# Altium PCB Shutdown_2019_v1.1.PcbDoc (part 1 of 2)
Units mil, origin at the board's own origin, x right, y up, seen from the top; angles counter-clockwise.
Board outline 4900 x 3600 mil, 2 copper layers (Top, Bottom); 222 components, 139 nets, 683 pads, 335 vias.
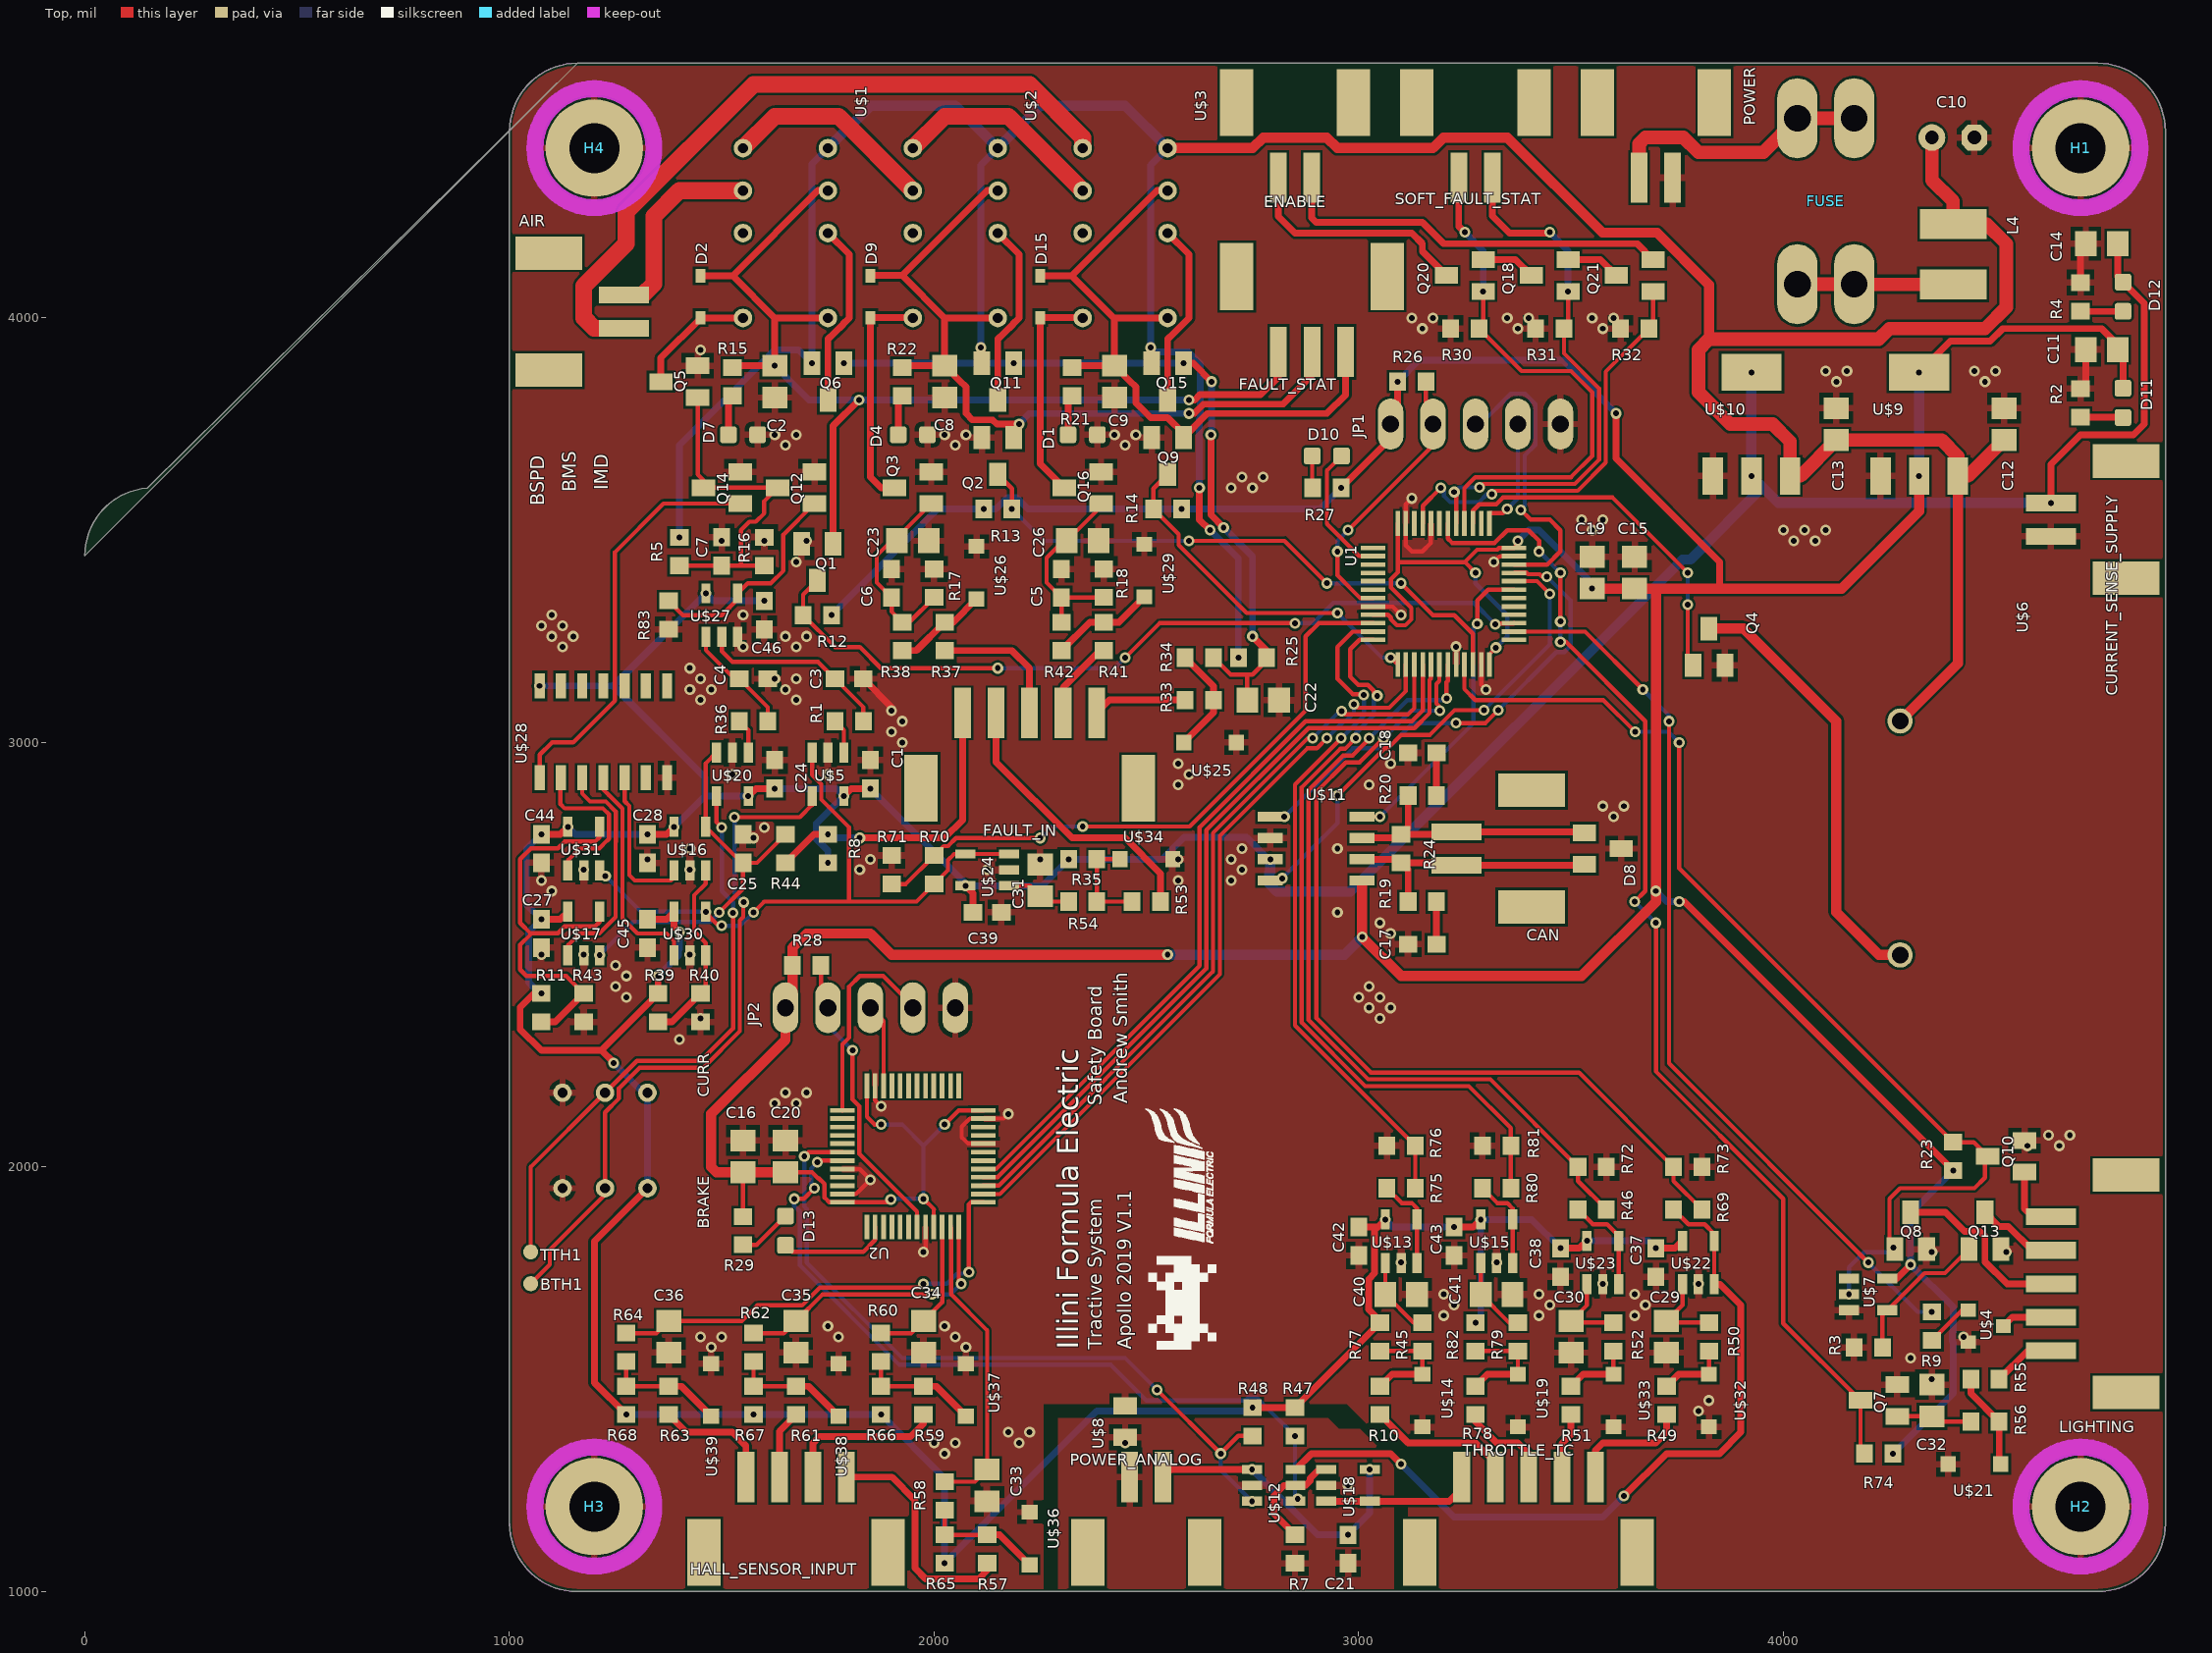
[diagram p0: Top view]
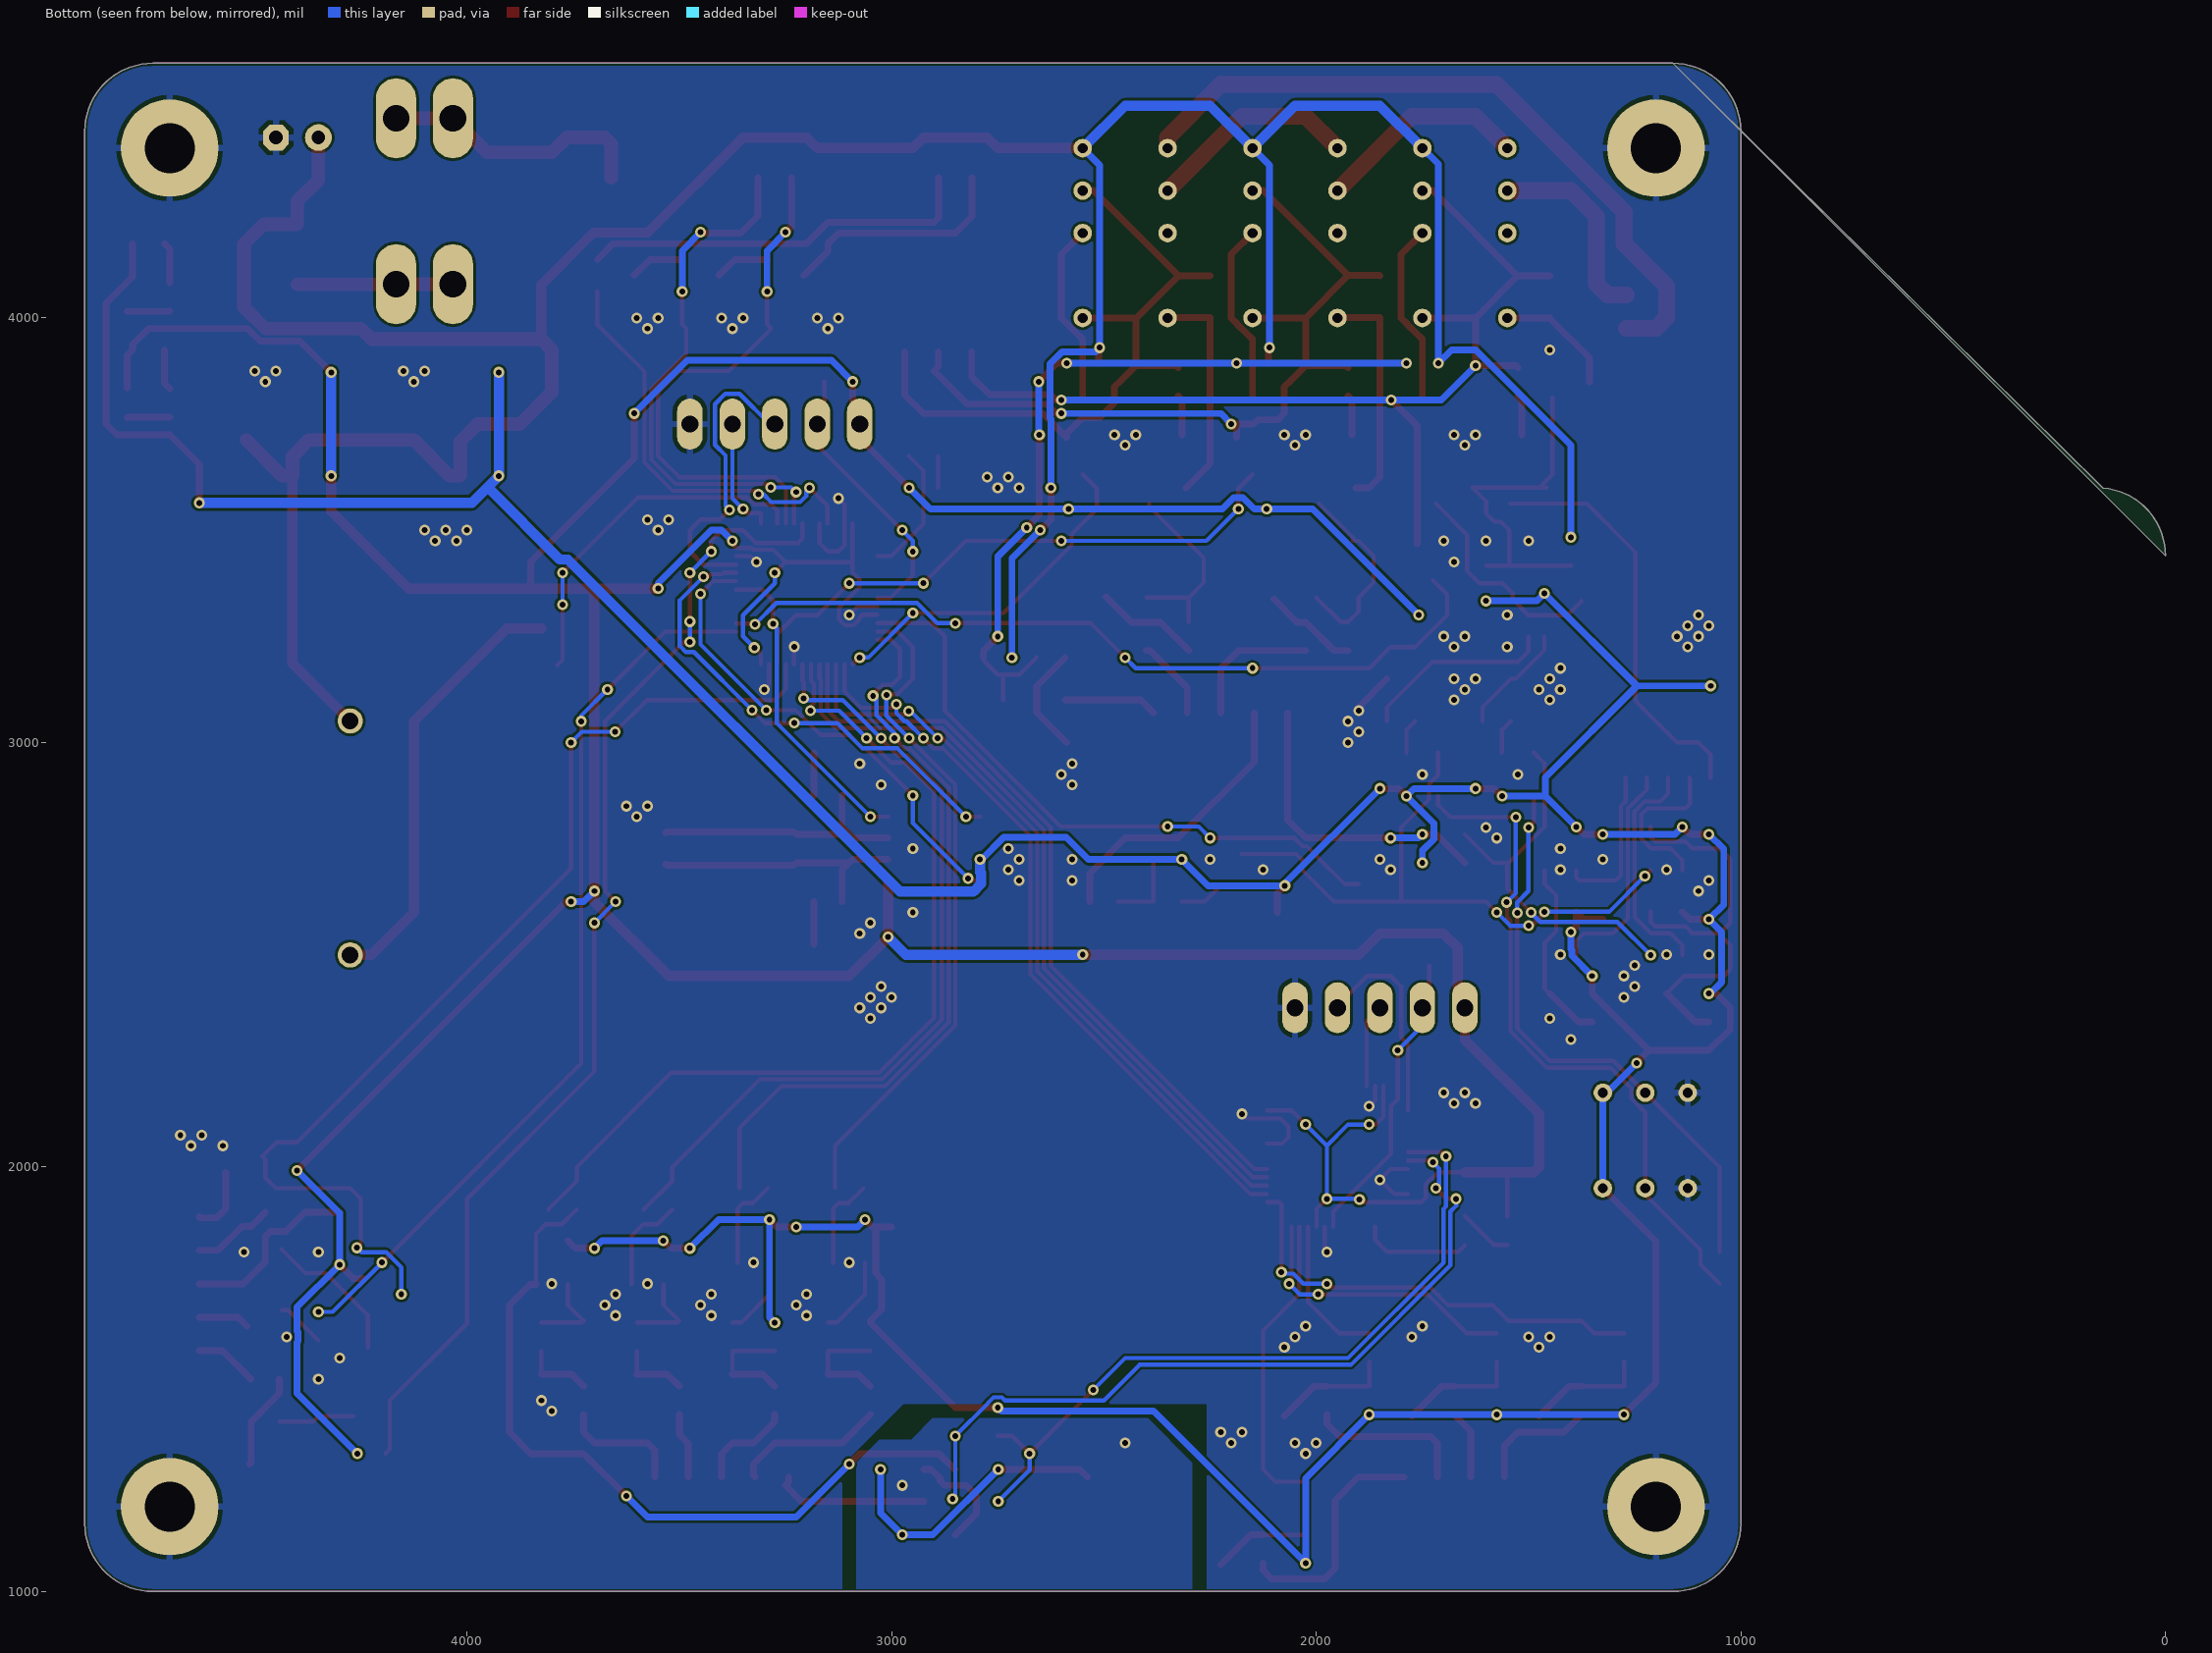
[diagram p1: Bottom view, seen from below]

## Layer stack, top to bottom
Top Solder: solder mask 0.4, Solder Resist, Dk 3.5
Top: signal copper 1.378
Dielectric 1: dielectric 12.6, FR-4, Dk 4.8
Bottom: signal copper 1.378
Bottom Solder: solder mask 0.4, Solder Resist, Dk 3.5

## Board outline
1160,4600 ccw(c1160,4440) 1000,4440 1000,1160 ccw(c1160,1160) 1160,1000 4740,1000 ccw(c4740,1160) 4900,1160 4900,4440 ccw(c4740,4440) 4740,4600 1160,4600 ccw(c160,3440)

## Design rules (kind name [scope] priority, off if disabled: settings)
Clearance "Clearance (Same Net)" [All] p1: gap=6 ignorepadtopadclearanceinfootprint=FALSE except(0: SMDPad-SMDPad SMDPad-THPad SMDPad-Via)
Clearance [All] p2: gap=6 ignorepadtopadclearanceinfootprint=FALSE except(16: Arc-Poly Track-Poly SMDPad-Poly THPad-Poly Via-Poly Fill-Poly Poly-Poly Poly-Region Poly-Text Poly-Hole)
HoleSize HoleSize_For_NetClass_PWR_IN [InNetClass('PWR_IN')] p1: absolutevalues=TRUE maxlimit=0 minlimit=0 maxpercent=80.000 minpercent=20.000
HoleSize HoleSize_For_NetClass_AIR [InNetClass('AIR')] p2: absolutevalues=TRUE maxlimit=0 minlimit=0 maxpercent=80.000 minpercent=20.000
HoleSize HoleSize_For_NetClass_PWR [InNetClass('PWR')] p3: absolutevalues=TRUE maxlimit=0 minlimit=0 maxpercent=80.000 minpercent=20.000
HoleSize [All] p4: absolutevalues=TRUE maxlimit=100000 minlimit=12 maxpercent=80.000 minpercent=20.000
HoleToHoleClearance mdDrill [All] p1: gap=10 allowstackedmicrovias=TRUE
PasteMaskExpansion Expansion_SMDPaste_OFF [InPadClass('SMDPaste_OFF')] p1: expansion=0
PasteMaskExpansion mlMinCreamFrame [All] p2: expansion=0
PolygonConnect ThermalVias [IsVia] p1: connectstyle=Direct reliefconductorwidth=10 reliefentries=4 polygonreliefangle="90 Angle" airgapwidth=10
PolygonConnect [All] p2: connectstyle=Relief reliefconductorwidth=16 reliefentries=4 polygonreliefangle="90 Angle" airgapwidth=10
RoutingVias [All] p1: holewidth=12 width=24 viastyle="Through Hole" minholewidth=12 minwidth=24 maxholewidth=100 maxwidth=100
SolderMaskExpansion Expansion_SMDSolder_OFF [InPadClass('SMDSolder_OFF')] p1: expansion=0
SolderMaskExpansion mlMinStopFrame [All] p2: expansion=2
Width Width_For_NetClass_PWR_IN [InNetClass('PWR_IN')] p1: maxlimit=32 minlimit=10 preferedwidth=16
Width Width_For_NetClass_AIR [InNetClass('AIR')] p2: maxlimit=100 minlimit=10 preferedwidth=50
Width Width_For_NetClass_PWR [InNetClass('PWR')] p3: maxlimit=10 minlimit=10 preferedwidth=10
Width [All] p4: maxlimit=10000 minlimit=6 preferedwidth=6
27 further rules are at their usual default settings.

## Classes and differential pairs
polygon class Isolate_16: Polygon_1_Net_AGND Polygon_1_Net_GND Polygon_2_Net_AGND Polygon_2_Net_GND
pad class SMDSolder_OFF: U$7-1 U$7-2 U$7-3 U$7-4 U$7-5
pad class SMDPaste_OFF: BTH1-TP TTH1-TP U$7-1 U$7-2 U$7-3 U$7-4 U$7-5
net class PWR_IN: +12V N$6 PWR
net class PWR: +3V3 +5V ANALOG_5V

## Components (designator, comment, footprint, x,y, rotation, side; value= is the part's Value field where it differs from the comment)
AIR "" 505575-02 1250,4015 r90 top
BRAKE "" PV36 1225,1950 r180 top
BTH1 "" TP09R 1050,1725 r270 top
C1 "" C0603 1850,2925 r90 top
C2 "" C0805 1625,3850 r270 top
C3 "" C0603 1800,3150 r0 top
C4 "" C0603 1575,3150 r0 top
C5 "" C0603 2300,3375 r90 top
C6 "" C0603 1900,3375 r90 top
C7 "" C0603 1500,3450 r90 top
C8 "" C0805 2025,3850 r270 top
C9 "" C0805 2425,3850 r270 top
C10 "" E2,5-7 4400,4425 r0 top
C11 "" C0805 4750,3925 r180 top
C12 "" C0805 4520,3750 r90 top
C13 "" C0805 4125,3750 r90 top
C14 "" C0805 4750,4175 r180 top
C15 "" C0805 3650,3400 r90 top
C16 "" C0805 1550,2025 r90 top
C17 "" C0603 3150,2525 r180 top
C18 "" C0603 3150,2975 r180 top
C19 "" C0805 3550,3400 r90 top
C20 "" C0805 1650,2025 r90 top
C21 "" C0603 2975,1100 r270 top
C22 "" C0805 2775,3100 r0 top
C23 "" C0805 1950,3475 r0 top
C24 "" C0603 1625,2925 r90 top
C25 "" C0603 1550,2750 r90 top
C26 "" C0805 2350,3475 r0 top
C27 "" C0603 1075,2550 r270 top
C28 "" C0603 1325,2750 r270 top
C29 "" C0805 3725,1600 r270 top
C30 "" C0805 3500,1600 r270 top
C31 "" C0805 2250,2675 r90 top
C32 "" C0805 4350,1450 r90 top
C33 "" C0805 2125,1250 r270 top
C34 "" C0805 1975,1600 r270 top
C35 "" C0805 1675,1600 r270 top
C36 "" C0805 1375,1600 r270 top
C37 "" C0603 3700,1775 r270 top
C38 "" C0603 3475,1775 r270 top
C39 "" C0603 2125,2600 r0 top
C40 "" C0805 3100,1700 r0 top
C41 "" C0805 3325,1700 r0 top
C42 "" C0603 3000,1825 r270 top
C43 "" C0603 3225,1825 r270 top
C44 "" C0603 1075,2750 r270 top
C45 "" C0603 1325,2550 r270 top
C46 "" C0603 1600,3300 r270 top
CAN "" 505575-02 3250,2750 r270 top
CURR "" PV36 1225,2175 r180 top
CURRENT_SENSE_SUPPLY "" 505575-02 4650,3525 r270 top
D1 "" LED-0603 2350,3725 r270 top
D2 "" SOD323-F 1450,4050 r270 top
D4 "" LED-0603 1950,3725 r270 top
D7 "" LED-0603 1550,3725 r270 top
D8 "" SOT23 3575,2750 r270 top
D9 "" SOD323-F 1850,4050 r270 top
D10 "" LED-0603 2925,3675 r270 top
D11 "" LED-0603 4800,3800 r180 top
D12 "" LED-0603 4800,4050 r180 top
D13 "" LED-0603 1650,1850 r180 top
D15 "" SOD323-F 2250,4050 r270 top
ENABLE "" 505575-02 2850,4350 r0 top
FAULT_IN "" 505575-05 2225,3050 r180 top
FAULT_STAT "" 505575-03 2890,3940 r0 top
FUSE "" 3568 4100,4275 r270 top
H1 "" 3,0-PAD 4700,4400 r0 top
H2 "" 3,0-PAD 4700,1200 r0 top
H3 "" 3,0-PAD 1200,1200 r0 top
H4 "" 3,0-PAD 1200,4400 r0 top
HALL_SENSOR_INPUT "" 505575-04 1675,1250 r180 top
JP1 "" 1X05 3275,3750 r0 top
JP2 "" 1X05 1850,2375 r0 top
L4 "" INDUCTOR_5X5MM_NR5040_NOTHERMALS 4400,4150 r90 top
LIGHTING "" 505575-05 4650,1725 r270 top
POWER "" 505575-02 3700,4350 r0 top
POWER_ANALOG "" 505575-02 2500,1250 r180 top
Q1 "" SOT23 1725,3425 r180 top
Q2 "" SOT23 2150,3675 r180 top
Q3 "" SOT23 1950,3600 r90 top
Q4 "" SOT23 3825,3225 r0 top
Q5 "" SOT23 1400,3850 r90 top
Q6 "" SOT23 1750,3850 r180 top
Q7 "" SOT23 4225,1450 r90 top
Q8 "" SOT23 4300,1850 r0 top
Q9 "" SOT23 2550,3675 r180 top
Q10 "" SOT23 4525,2025 r90 top
Q11 "" SOT23 2150,3850 r180 top
Q12 "" SOT23 1675,3600 r90 top
Q13 "" SOT23 4475,1850 r0 top
Q14 "" SOT23 1500,3600 r90 top
Q15 "" SOT23 2550,3850 r180 top
Q16 "" SOT23 2350,3600 r90 top
Q18 "" SOT23 3450,4100 r90 top
Q20 "" SOT23 3250,4100 r90 top
Q21 "" SOT23 3650,4100 r90 top
R1 "" R0603 1800,3050 r180 top
R2 "" R0603 4700,3800 r270 top
R3 "" R0603 4200,1575 r0 top
R4 "" R0603 4700,4050 r270 top
R5 "" R0603 1400,3450 r90 top
R7 "" R0603 2850,1100 r90 top
R8 "" R0603 1750,2750 r270 top
R9 "" R0603 4350,1625 r270 top
R10 "" R0603 3050,1450 r90 top
R11 "" R0603 1075,2375 r90 top
R12 "" R0603 1725,3300 r0 top
R13 "" R0603 2150,3550 r180 top
R14 "" R0603 2550,3550 r0 top
R15 "" R0603 1525,3850 r270 top
R16 "" R0603 1600,3450 r270 top
R17 "" R0603 2000,3375 r270 top
R18 "" R0603 2400,3375 r270 top
R19 "" R0603 3150,2625 r180 top
R20 "" R0603 3150,2875 r180 top
R21 "" R0603 2325,3850 r270 top
R22 "" R0603 1925,3850 r270 top
R23 "" R0603 4400,2025 r270 top
R24 "" R0603 3100,2750 r90 top
R25 "" R0603 2750,3200 r180 top
R26 "" R0603 3125,3850 r0 top
R27 "" R0603 2925,3600 r180 top
R28 "" R0603 1700,2475 r0 top
R29 "" R0603 1550,1850 r270 top
R30 "" R0603 3250,3975 r0 top
R31 "" R0603 3450,3975 r0 top
R32 "" R0603 3650,3975 r0 top
R33 "" R0603 2625,3100 r0 top
R34 "" R0603 2625,3200 r0 top
R35 "" R0603 2350,2725 r180 top
R36 "" R0603 1575,3050 r180 top
R37 "" R0603 2025,3250 r90 top
R38 "" R0603 1925,3250 r90 top
R39 "" R0603 1350,2375 r90 top
R40 "" R0603 1450,2375 r90 top
R41 "" R0603 2400,3250 r90 top
R42 "" R0603 2300,3250 r90 top
R43 "" R0603 1175,2375 r90 top
R44 "" R0603 1650,2750 r270 top
R45 "" R0603 3150,1600 r90 top
R46 "" R0603 3550,1900 r180 top
R47 "" R0603 2850,1400 r270 top
R48 "" R0603 2750,1400 r270 top
R49 "" R0603 3725,1450 r90 top
R50 "" R0603 3825,1600 r90 top
R51 "" R0603 3500,1450 r90 top
R52 "" R0603 3600,1600 r90 top
R53 "" R0603 2500,2625 r180 top
R54 "" R0603 2350,2625 r180 top
R55 "" R0603 4475,1500 r180 top
R56 "" R0603 4475,1400 r180 top
R57 "" R0603 2125,1100 r90 top
R58 "" R0603 2025,1225 r90 top
R59 "" R0603 1975,1450 r90 top
R60 "" R0603 1875,1575 r90 top
R61 "" R0603 1675,1450 r90 top
R62 "" R0603 1575,1575 r90 top
R63 "" R0603 1375,1450 r90 top
R64 "" R0603 1275,1575 r90 top
R65 "" R0603 2025,1100 r270 top
R66 "" R0603 1875,1450 r270 top
R67 "" R0603 1575,1450 r270 top
R68 "" R0603 1275,1450 r270 top
R69 "" R0603 3775,1900 r180 top
R70 "" R0603 2000,2700 r270 top
R71 "" R0603 1900,2700 r270 top
R72 "" R0603 3550,2000 r180 top
R73 "" R0603 3775,2000 r180 top
R74 "" R0603 4225,1325 r0 top
R75 "" R0603 3100,1950 r180 top
R76 "" R0603 3100,2050 r0 top
R77 "" R0603 3050,1600 r90 top
R78 "" R0603 3275,1450 r90 top
R79 "" R0603 3375,1600 r90 top
R80 "" R0603 3325,1950 r180 top
R81 "" R0603 3325,2050 r0 top
R82 "" R0603 3275,1600 r90 top
R83 "" R0603 1375,3300 r90 top
SOFT_FAULT_STAT "" 505575-02 3275,4350 r0 top
THROTTLE_TC "" 505575-05 3400,1250 r180 top
TTH1 "" TP09R 1050,1800 r270 top
U1 "" QFP50P900X900X160-48N 3200,3350 r0 top
U2 "" QFP50P900X900X160-48N 1950,2025 r90 top
U$1 "" DPDT_2.54 1650,4250 r90 top
U$2 "" DPDT_2.54 2050,4250 r90 top
U$3 "" DPDT_2.54 2450,4250 r90 top
U$4 "" SOT23-3 4475,1625 r270 top
U$5 "" SOT23-5 1750,2925 r180 top
U$6 "" MAS806Q 4275,2775 r180 top
U$7 "" SOT23-5L 4200,1700 r270 top
U$8 "" L0805 2450,1400 r90 top
U$9 "" SOT223 4320,3750 r0 top
U$10 "" SOT223 3925,3750 r0 top
U$11 "" SOIC8#1 2900,2750 r270 top
U$12 "" SOT23-6 2800,1250 r270 top
U$13 "" SOT23-5 3100,1825 r0 top
U$14 "" SOD-123 3150,1450 r270 top
U$15 "" SOT23-5 3325,1825 r0 top
U$16 "" SOT23-5 1425,2750 r0 top
U$17 "" SOT23-5 1175,2550 r0 top
U$18 "" SOT23-5 2975,1250 r270 top
U$19 "" SOD-123 3375,1450 r270 top
U$20 "" SOT23-5 1525,2925 r180 top
U$21 "" SOD-123 4450,1300 r180 top
U$22 "" SOT23-5 3800,1775 r0 top
U$23 "" SOT23-5 3575,1775 r0 top
U$24 "" SOT23-5 2125,2700 r90 top
U$25 "" SOD-123 2650,3000 r0 top
U$26 "" SOD-123 2100,3400 r90 top
U$27 "" SOT23-5 1500,3300 r0 top
U$28 "" SOIC8#2 1225,3025 r0 top
U$29 "" SOD-123 2495,3405 r90 top
U$30 "" SOT23-5 1425,2550 r0 top
U$31 "" SOT23-5 1175,2750 r0 top
U$32 "" SOD-123 3825,1450 r270 top
U$33 "" SOD-123 3600,1450 r270 top
U$34 "" SOD-123 2500,2725 r0 top
U$36 "" SOD-123 2225,1125 r90 top
U$37 "" SOD-123 2075,1475 r90 top
U$38 "" SOD-123 1775,1475 r90 top
U$39 "" SOD-123 1475,1475 r90 top

## Footprints (in the part's own frame and the unit in brackets; to place one, negate y for a bottom-side part, rotate by r counter-clockwise, add the part's x,y. Pads: shape width x height; smd on the part's side, far side on the other; paste and mask are expansions set on the pad)
1X05 [mil] "1X05"
  oval 60x120 / inner round 60 / far side oval 60x120 hole 40: 1(-200,0) 2(-100,0) 3(0,0) 4(100,0) 5(200,0)
3,0-PAD [mil] "3,0-PAD"
  round 230 / inner round 60 / far side round 230 hole 118.11: B3,0(0,0)
  Top keep-out circle w40: c0,0 r140
3568 [mil] "3568"
  oval 188.97x94.48 / inner round 60 / far side oval 188.97x94.48 hole 62.99: P$1(-195.28,66.93) P$2(195.28,66.93) P$3(195.28,-66.93) P$4(-195.28,-66.93)
505575-02 [mm] "505575-02"
  rect 1x3 smd: 1(-1,-0.5) 2(1,-0.5)
  rect 2x4 smd: P$3(-3.5,4) P$4(3.5,4)
505575-03 [mm] "505575-03"
  rect 1x3 smd: 1(-2,-0.5) 2(0,-0.5) 3(2,-0.5)
  rect 2x4 smd: P$3(-4.5,4) P$4(4.5,4)
505575-04 [mm] "505575-04"
  rect 1x3 smd: 1(-3,-0.5) 2(-1,-0.5) 3(1,-0.5) 4(3,-0.5)
  rect 2x4 smd: P$3(-5.5,4) P$4(5.5,4)
505575-05 [mm] "505575-05"
  rect 1x3 smd: 1(-4,-0.5) 2(-2,-0.5) 3(0,-0.5) 4(2,-0.5) 5(4,-0.5)
  rect 2x4 smd: P$3(-6.5,4) P$4(6.5,4)
C0603 [mm] "C0603"
  rect 1.1x1 smd: 1(-0.85,0) 2(0.85,0)
C0805 [mil] "C0805"
  rect 51.18x59.06 smd: 1(-37.4,0) 2(37.4,0)
DPDT_2.54 [mil] "DPDT_2.54"
  round 43.62 / inner round 60 / far side round 43.62 hole 23.62: $P1(-250,-100) $P3(-50,-100) $P4(50,-100) $P5(150,-100) $P8(150,100) $P9(50,100) $P10(-50,100) $P12(-250,100)
E2,5-7 [mil] "E2,5-7"
  round 63 / inner round 60 / far side round 63 hole 32: +(-50,0)
  oct 61x61 / inner oct 60x60 / far side oct 61x61 hole 32: -(50,0)
INDUCTOR_5X5MM_NR5040_NOTHERMALS [mm] "INDUCTOR_5X5MM_NR5040_NOTHERMALS"
  rect 1.8x4 smd: P$1(-1.8,0) P$2(1.8,0)
L0805 [mil] "L0805"
  rect 40.16x55.12 smd: 1(-37.01,0) 2(37.01,0)
LED-0603 [mm] "LED-0603"
  rrect30% 1x1 smd: A(0,-0.877) C(0,0.877)
MAS806Q [mm] "MAS806Q"
  round 1.508 / inner round 1.524 / far side round 1.508 hole 1: NEG(0,7) POS(0,-7)
PV36 [mil] "PV36"
  round 43.62 / inner round 60 / far side round 43.62 hole 23.62: A(-100,0) B(100,0) W(0,0)
QFP50P900X900X160-48N [mil] "QFP50P900X900X160-48N"
  rect 58x11 smd: 1(-166,108) 2(-166,89) 3(-166,69) 4(-166,49) 5(-166,30) 6(-166,10) 7(-166,-10) 8(-166,-30) 9(-166,-49) 10(-166,-69) 11(-166,-89) 12(-166,-108) 25(166,-108) 26(166,-89) 27(166,-69) 28(166,-49) 29(166,-30) 30(166,-10) 31(166,10) 32(166,30) 33(166,49) 34(166,69) 35(166,89) 36(166,108)
  rect 11x58 smd: 13(-108,-166) 14(-89,-166) 15(-69,-166) 16(-49,-166) 17(-30,-166) 18(-10,-166) 19(10,-166) 20(30,-166) 21(49,-166) 22(69,-166) 23(89,-166) 24(108,-166) 37(108,166) 38(89,166) 39(69,166) 40(49,166) 41(30,166) 42(10,166) 43(-10,166) 44(-30,166) 45(-49,166) 46(-69,166) 47(-89,166) 48(-108,166)
R0603 [mm] "R0603"
  rect 1x1.1 smd: 1(-0.85,0) 2(0.85,0)
SOD323-F [mil] "SOD323-F"
  rect 31.5x23.62 smd: A(49.21,0) C(-49.21,0)
SOD-123 [mil] "SOD-123"
  rect 35.43x37.4 smd: A(62.01,0) C(-62.01,0)
SOIC8#1 [mil] "SOIC8"
  rect 23.62x59.06 smd: 1(-75,-108.27) 2(-25,-108.27) 3(25,-108.27) 4(75,-108.27) 5(75,108.27) 6(25,108.27) 7(-25,108.27) 8(-75,108.27)
SOIC8#2 [mil] "SOIC8"
  rect 23.62x59.06 smd: P1(-153.74,-108.27) P2(-103.74,-108.27) P3(-53.74,-108.27) P4(-3.74,-108.27) P5(46.26,-108.27) P6(96.26,-108.27) P7(146.26,-108.27) P8(146.26,108.27) P9(96.26,108.27) P10(46.26,108.27) P11(-3.74,108.27) P12(-53.74,108.27) P13(-103.74,108.27) P14(-153.74,108.27)
SOT23 [mm] "SOT23"
  rect 1x1.4 smd: 1(-0.95,-1.1) 2(0.95,-1.1) 3(0,1.1)
SOT23-3 [mil] "SOT23-3"
  rect 31.5x35.43 smd: 1(-37.4,-39.37) 2(37.4,-39.37) 3(0,43.31)
SOT23-5 [mil] "SOT23-5"
  rect 21.65x47.24 smd: 1(-37.4,-51.18) 2(0,-51.18) 3(37.4,-51.18) 4(37.4,51.18) 5(-37.4,51.18)
SOT23-5L [mil] "SOT23-5L"
  rect 23.62x47.24 smd paste+0 mask+0: 1(-37.4,-45.28) 2(0,-45.28) 3(37.4,-45.28) 4(37.4,45.28) 5(-37.4,45.28)
SOT23-6 [mil] "SOT23-6"
  rect 21.65x47.24 smd: 1(-37.4,-51.18) 2(0,-51.18) 3(37.4,-51.18) 4(37.4,51.18) 5(0,51.18) 6(-37.4,51.18)
SOT223 [mil] "SOT223"
  rect 48x88 smd: 1(-91,-122) 2(0,-122) 3(91,-122)
  rect 141.73x86.61 smd: 4(0,122.01)
TP09R [mil] "TP09R"
  rrect100% 35.43x35.43 smd paste+0: TP(0,0)

## Part data
AIR CAN CURRENT_SENSE_SUPPLY ENABLE POWER POWER_ANALOG SOFT_FAULT_STAT: library part 505575-02, PackageName=505575-02
BRAKE CURR: library part PV36, PackageName=PV36
BTH1 TTH1: library part TP09R, PackageName=TP09R
C1 C3 C4 C5 C6 C7 C17 C18 C21 C24 C25 C27 C28 C37 C38 C39 C42 C43 C44 C45 C46: library part C0603, PackageName=C0603
C2 C8 C9 C11 C12 C13 C14 C15 C16 C19 C20 C22 C23 C26 C29 C30 C31 C32 C33 C34 C35 C36 C40 C41: library part C0805, PackageName=C0805
C10: library part E2,5-7, PackageName=E2,5-7
D1 D4 D7 D10 D11 D12 D13: library part LED-0603, PackageName=LED-0603
D2 D9 D15: library part SOD323-F, PackageName=SOD323-F
D8 Q1 Q2 Q3 Q4 Q5 Q6 Q7 Q8 Q9 Q10 Q11 Q12 Q13 Q14 Q15 Q16 Q18 Q20 Q21: library part SOT23, PackageName=SOT23
FAULT_IN LIGHTING THROTTLE_TC: library part 505575-05, PackageName=505575-05
FAULT_STAT: library part 505575-03, PackageName=505575-03
FUSE: library part 3568, PackageName=3568
H1 H2 H3 H4: library part 3,0-PAD, PackageName=3,0-PAD
HALL_SENSOR_INPUT: library part 505575-04, PackageName=505575-04
JP1 JP2: library part 1X05, PackageName=1X05
L4: library part INDUCTOR_5X5MM_NR5040_NOTHERMALS, PackageName=INDUCTOR_5X5MM_NR5040_NOTHERMALS
R1 R2 R3 R4 R5 R7 R8 R9 R10 R11 R12 R13 R14 R15 R16 R17 R18 R19 R20 R21 R22 R23 R24 R25 R26 R27 R28 R29 R30 R31 R32 R33 R34 R35 R36 R37 R38 R39 R40 R41 R42 R43 R44 R45 R46 R47 R48 R49 R50 R51 R52 R53 R54 R55 R56 R57 R58 R59 R60 R61 R62 R63 R64 R65 R66 R67 R68 R69 R70 R71 R72 R73 R74 R75 R76 R77 R78 R79 R80 R81 R82 R83: library part R0603, PackageName=R0603
U1 U2: library part QFP50P900X900X160-48N, PackageName=QFP50P900X900X160-48N
U$1 U$2 U$3: library part DPDT_2.54, PackageName=DPDT_2.54
U$4: library part SOT23-3, PackageName=SOT23-3
U$5 U$13 U$15 U$16 U$17 U$18 U$20 U$22 U$23 U$24 U$27 U$30 U$31: library part SOT23-5, PackageName=SOT23-5
U$6: library part MAS806Q, PackageName=MAS806Q
U$7: library part SOT23-5L, PackageName=SOT23-5L
U$8: library part L0805, PackageName=L0805
U$9 U$10: library part SOT223, PackageName=SOT223
U$11 U$28: library part SOIC8, PackageName=SOIC8
U$12: library part SOT23-6, PackageName=SOT23-6
U$14 U$19 U$21 U$25 U$26 U$29 U$32 U$33 U$34 U$36 U$37 U$38 U$39: library part SOD-123, PackageName=SOD-123

## Via types
v1: diameter 25.78/25.78 (per signal layer), hole 13.78, Top to Bottom, 335 vias

## Nets (pads, with @x,y where several pads share a name; then routed paths per layer and width w, separated by ;. In a path a pad name is that pad's centre, name@x,y a point inside that pad or via, vN(x,y) a via of type N, cw(c..) or ccw(c..) an arc to the next point about the centre after c; other vN are vias at no path point)
!RST: JP1.2 R26.2 U1.7 | length 662.5
  Top w10: v1(2950,3450) 2950,3393.94 3003.94,3340 U1.7@3034,3340 ; v1(2975,3500) 3175,3700 JP1.2@3175,3750 3158.46,3766.54 R26.2@3158.46,3850
  Bottom w10: v1(2950,3450) 2950,3475 v1(2975,3500)
!RST_TC: JP2.2 R28.2 U2.7 | length 709.8
  Top w10: R28.2@1733.46,2475 1733.46,2391.54 JP2.2@1750,2375 ; v1(1807.89,2275) 1807.89,2159.17 1824,2143.06 1824,2031 1960,1895 U2.7@1960,1859
  Bottom w10: JP2.2@1750,2375 1750,2332.89 v1(1807.89,2275)
+3V3: C11.1 C15.1 C16.1 C19.1 C20.1 D11.A JP1.1 JP2.1 R12.2 R13.2 R14.2 R23.2 R26.1 R27.1 R28.1 R29.1 R74.2 U1.9 U1.24 U1.36 U1.48 U2.9 U2.24 U2.36 U2.48 U$7.5 U$9.2 U$9.4 U$11.5 | length 12561.8
  Top w10: R29.1@1550,1883.46 C16.1@1550,1987.6 ; C20.1@1650,1987.6 1712.4,1987.6 1726.11,1973.89 1728.22,1973.89 1742.21,1959.9 1742.21,1927.73 1752.94,1917 U2.48@1784,1917 1892,1917 v1(1898.11,1923.11) ; U2.36@1842,2191 1842,2118 1860,2100 v1(1875,2100) ; v1(1975,1925) 2000,1900 1999,1899 U2.9@1999,1859 ; v1(2025,2100) 2058,2133 U2.24@2116,2133 ; U1.9@3034,3301 3069,3301 3076.11,3293.89 3076.11,3290.1 3090.1,3276.11 3109.9,3276.11 3123.89,3290.1 3123.89,3317.32 3076.11,3365.1 3076.11,3384.9 3092,3400.79 3092,3425 ; U1.48@3092,3516 3092,3425 ; v1(3275,3400) 3250,3425 ; U1.24@3308,3184 3308,3208 v1(3323.39,3223.39) ; v1(3375,3475) 3375,3467 U1.36@3366,3458 3330.63,3458 3326.63,3454 3279,3454 3250,3425 ; 3092,3425 3250,3425
  Top w16: v1(2958.46,3600) 3075,3716.54 JP1.1@3075,3750 3091.54,3766.54 v1(3091.54,3850) ; v1(3605.89,3775) 3605.89,3669.11 3850,3425 3850,3362.6 ; v1(3754.78,2625) 3766.54,2625 v1(4400,1991.54) ; U$7.5@4245.28,1737.4 4267.27,1737.4 v1(4300,1770.14) ; v1(4320,3872.01) 4392.99,3945 4487.43,3945 4517.43,3975 4750,3975 4787.4,3937.6 C11.1@4787.4,3925 4800,3912.4 D11.A@4800,3834.53
  Top w24: C20.1@1650,1987.6 C16.1@1550,1987.6 1487.4,1987.6 1475,2000 1475,2125 1650,2300 JP2.1@1650,2375 1666.54,2391.54 R28.1@1666.54,2475 1666.54,2516.54 1700,2550 1850,2550 1900,2500 v1(2550,2500) ; U$11.5@3008.27,2675 v1(3008.27,2541.73) 3100,2450 3525,2450 3700,2625 v1(3700,2650) 3700,3362.6 ; v1(3550,3362.6) C15.1@3650,3362.6 3700,3362.6 ; v1(4320,3628) 4320,3545 4137.6,3362.6 3850,3362.6 3700,3362.6
  Bottom w10: v1(1875,2100) 1925,2100 1975,2050 ; v1(1898.11,1923.11) 1900,1925 v1(1975,1925) 1975,2050 ; v1(2025,2100) 1975,2050 ; v1(3275,3400) 3275,3375 3350,3300 3350,3250 v1(3323.39,3223.39)
  Bottom w16: v1(1758.46,3300) 2008.46,3550 v1(2116.54,3550) 2145.44,3550 2172.33,3576.89 2194.6,3576.89 2221.49,3550 v1(2583.46,3550) 2908.46,3550 v1(2958.46,3600) ; v1(3091.54,3850) 3141.54,3900 3480.89,3900 v1(3605.89,3775) ; v1(3375,3475) 3400,3500 3425,3500 3550,3375 v1(3550,3362.6) ; v1(3700,2650) 3725,2625 v1(3754.78,2625) ; v1(4258.46,1325) 4400,1466.54 4400,1586.97 4398.11,1588.86 4398.11,1611.14 4400,1613.03 4400,1670.14 v1(4300,1770.14) 4300,1891.54 v1(4400,1991.54)
  Bottom w24: v1(2550,2500) 2966.54,2500 v1(3008.27,2541.73) ; v1(4320,3628) v1(4320,3872.01)
+5V: BRAKE.A C1.1 C14.1 C24.1 C27.1 C28.1 C37.1 C38.1 C39.1 C42.1 C43.1 C44.1 C45.1 C46.1 CURR.A CURRENT_SENSE_SUPPLY.1 D12.A R8.2 R11.2 R35.2 R39.2 R47.1 R48.1 R65.2 R66.2 R67.2 R68.2 R77.2 R82.2 U$5.5 U$10.2 U$10.4 U$11.3 U$13.5 U$15.5 U$16.5 U$17.5 U$20.5 U$22.5 U$23.5 U$24.5 U$27.5 U$28.P14 U$30.5 U$31.5 | length 12493.7
  Top w16: v1(1075,2408.46) 1058.46,2408.46 1025,2375 1025,2325 1075,2275 1216.54,2275 ; v1(1075,2583.46) 1119.88,2583.46 U$17.5@1137.6,2601.18 ; v1(1075,2783.46) 1119.88,2783.46 v1(1137.6,2801.18) ; v1(1245,2245) 1245,2246.54 1216.54,2275 ; v1(1275,1416.54) 1200,1491.54 1200,1825 BRAKE.A@1325,1950 ; C45.1@1325,2583.46 1369.88,2583.46 U$30.5@1387.6,2601.18 1387.6,2566.19 v1(1400.38,2553.4) ; v1(1325,2783.46) 1369.88,2783.46 v1(1387.6,2801.18) ; v1(1350,2450) R39.2@1350,2408.46 1216.54,2275 ; v1(1562.4,2873.82) 1580.12,2891.54 v1(1625,2891.54) ; v1(1787.4,2873.82) 1805.12,2891.54 v1(1850,2891.54) ; v1(2073.82,2662.6) 2091.54,2644.88 C39.1@2091.54,2600 ; v1(2750,1433.46) R47.1@2850,1433.46 R77.2@3050,1633.46 3050,1637.68 3023.01,1664.67 3023.01,1735.33 3037.77,1750.09 3037.77,1851.35 3044.88,1858.46 ; C42.1@3000,1858.46 3044.88,1858.46 ; v1(3062.6,1876.18) 3044.88,1858.46 ; v1(3225,1858.46) 3269.88,1858.46 v1(3287.6,1876.18) ; v1(3475,1808.46) 3519.88,1808.46 v1(3537.6,1826.18) ; v1(3700,1808.46) 3744.88,1808.46 U$22.5@3762.6,1826.18 ; v1(4630.32,3564.37) 4630.32,3655.32 4700,3725 4825,3725 4850,3750 4850,4034.53 D12.A@4800,4084.53 4787.4,4097.13 C14.1@4787.4,4175
  Bottom w16: v1(1071.26,3133.27) 1244.69,3133.27 ; v1(1075,2408.46) 1071.54,2408.46 1045,2435 1045,2553.46 v1(1075,2583.46) 1040,2618.46 1040,2748.46 v1(1075,2783.46) ; v1(1137.6,2801.18) 1155.32,2783.46 v1(1325,2783.46) ; v1(1245,2245) 1315,2175 CURR.A@1325,2175 BRAKE.A@1325,1950 ; v1(1275,1416.54) v1(1575,1416.54) v1(1875,1416.54) 2025,1266.54 v1(2025,1066.54) 2383.46,1425 2741.54,1425 v1(2750,1433.46) ; v1(1350,2450) 1398.11,2498.11 1398.11,2511.14 1400.38,2513.41 v1(1400.38,2553.4) ; v1(1387.6,2801.18) 1460.24,2873.82 ; v1(1562.4,2873.82) 1460.24,2873.82 ; v1(1600,3333.46) 1480.32,3333.46 v1(1462.6,3351.18) 1244.69,3133.27 ; v1(1625,2891.54) 1769.68,2891.54 v1(1787.4,2873.82) 1723.11,2809.53 1723.11,2772.33 1750,2745.44 v1(1750,2716.54) ; v1(1850,2891.54) 2073.82,2667.72 v1(2073.82,2662.6) 2254.13,2662.6 v1(2316.54,2725) 2536.97,2725 2588.86,2776.89 2736.14,2776.89 2788.03,2725 v1(2791.73,2725) ; v1(3062.6,1876.18) 3080.32,1858.46 v1(3225,1858.46) ; v1(3275,1633.46) 3287.6,1646.06 v1(3287.6,1876.18) 3407.28,1876.18 v1(3475,1808.46) ; v1(3537.6,1826.18) 3682.28,1826.18 v1(3700,1808.46) ; 1244.69,3133.27 1460.24,2917.72 1460.24,2873.82
  Bottom w24: v1(2791.73,2725) 2791.73,2695.42 2789.11,2692.8 2789.11,2667.21 2807.21,2649.11 2980.43,2649.11 3762.21,3430.89 3780.89,3430.89 3951.5,3601.5 ; v1(3925,3872.01) v1(3925,3628) 3951.5,3601.5 ; v1(4630.32,3564.37) 3988.63,3564.37 3951.5,3601.5
+12V: C10.+ C12.1 C13.1 L4.P$2 Q6.2 Q11.2 Q15.2 R5.2 R25.2 U$1.$P5 U$2.$P5 U$3.$P5 U$6.POS U$9.3 U$10.3 | length 8613.7
  Top w16: v1(2110,3930) 2112.6,3927.4 Q11.2@2112.6,3893.31 ; v1(2510,3930) 2512.6,3927.4 Q15.2@2512.6,3893.31 ; v1(2625,3600) 2625,3525 v1(2650,3500)
  Top w24: U$3.$P5@2550,4400 2750,4400 2775,4425 2925,4425 2950,4400 3175,4400 3200,4425 3350,4425 3574,4201 3702.41,4201 3825,4078.41 3825,3950 ; U$6.POS@4275,3050.59 4411,3186.59 U$9.3@4411,3628
  Top w32: C10.+@4350,4425 4350,4325 4400,4275 L4.P$2@4400,4220.87 4479.13,4220.87 4525,4175 4525,4025 4475,3975 4250,3975 4225,3950 3825,3950 3800,3925 3800,3825 3875,3750 3975,3750 4016,3709 U$10.3@4016,3628 4040.4,3628 C13.1@4125,3712.6 4372.4,3712.6 4411,3674 U$9.3@4411,3628 4435.4,3628 C12.1@4520,3712.6
  Bottom w16: v1(1400,3483.46) 1400,3700.43 1624.57,3925 1680.91,3925 v1(1712.6,3893.31) 1712.6,4362.6 U$1.$P5@1750,4400 ; v1(2110,3930) 2110,4360 U$2.$P5@2150,4400 ; U$3.$P5@2550,4400 2510,4360 v1(2510,3930) 2519.8,3920.2 2598.54,3920.2 2626.89,3891.85 2626.89,3763.86 2625,3761.97 v1(2625,3600) ; v1(2650,3500) 2716.54,3433.46 v1(2716.54,3200)
  Bottom w24: U$1.$P5@1750,4400 1850,4500 2050,4500 U$2.$P5@2150,4400 2250,4500 2450,4500 U$3.$P5@2550,4400
AGND: C21.2 POWER_ANALOG.2 R7.1 U$8.1 U$12.2 U$18.2
  other v1: 2975,1250 2450,1350
AIR_IN: AIR.2 U$1.$P9 | length 475.8
  Top w40: AIR.2@1269.69,4054.37 1314.37,4054.37 1340,4080 1340,4240 1400,4300 U$1.$P9@1550,4300
AIR_OUT: AIR.1 U$3.$P8 | length 1672.4
  Top w40: AIR.1@1269.69,3975.63 1199.37,3975.63 1175,4000 1175,4075.19 1199.86,4100.06 1200.06,4100.06 1275,4175 1275,4250 1575,4550 2225,4550 2350,4425 U$3.$P8@2350,4400
ANALOG_5V: C21.1 POWER_ANALOG.1 U$12.1 U$18.5 | length 681.9
  Top w16: POWER_ANALOG.1@2539.37,1269.69 2557.09,1287.4 v1(2748.82,1287.4)
  Bottom w16: v1(2748.82,1287.4) 2902.76,1133.46 v1(2975,1133.46) 3026.18,1184.65 v1(3026.18,1287.4)
APPS_EN: Q20.1 R30.2 SOFT_FAULT_STAT.1 U1.40 | length 1277.4
  Top w10: U1.40@3249,3516 3249,3599 3275,3625 3500,3625 3550,3675 3550,3825 3500,3875 3383.46,3875 R30.2@3283.46,3975 3293.31,3984.84 v1(3293.31,4062.6)
  Top w16: SOFT_FAULT_STAT.1@3235.63,4330.31 3235.63,4216.26 v1(3250,4201.89)
  Bottom w16: v1(3250,4201.89) 3293.31,4158.58 v1(3293.31,4062.6)
BRAKE_LIGHT-: LIGHTING.4 U$4.3 | length 120.8
  Top w16: U$4.3@4518.31,1625 4539.57,1646.26 LIGHTING.4@4630.31,1646.26
BRAKE_LIGHT_EN: R9.1 U1.26 | length 2127.6
  Top w10: U1.26@3366,3261 3533.11,3261 v1(3669.11,3125) ; v1(3730.89,3050) 3730.89,2244.11 v1(4200,1775)
  Bottom w10: v1(3669.11,3125) 3730.89,3063.22 v1(3730.89,3050) ; v1(4200,1775) 4316.54,1658.46 v1(4350,1658.46)
BRAKE_POS: R10.1 THROTTLE_TC.4 | length 355.1
  Top w16: R10.1@3050,1416.54 3116.54,1350 3275,1350 3325,1300 3325,1273.43 THROTTLE_TC.4@3321.26,1269.69
BRAKE_POS_F: R75.2 U$13.3 U$13.4 | length 219.3
  Top w10: R75.2@3066.54,1950 3101.54,1915 3125,1915 3137.4,1902.6 U$13.4@3137.4,1876.18 U$13.3@3137.4,1773.82
BRAKE_POS_F_3_3: R75.1 R76.2 U1.11 | length 1598.7
  Top w10: v1(2959.09,3010.11) 2850,2901.02 2850,2333.46 R76.2@3133.46,2050 R75.1@3133.46,1950 ; v1(3011.89,3111.89) 3000.73,3111.89 2998.84,3113.78 2986.22,3113.78 2950,3150 2950,3225 2986,3261 U1.11@3034,3261
  Bottom w10: v1(2959.09,3010.11) 3012.83,3063.85 3012.83,3099.79 3011.89,3100.73 v1(3011.89,3111.89)
BRAKE_PRESSURE: FAULT_IN.4 R53.1 | length 678.3
  Top w16: FAULT_IN.4@2146.26,3069.69 2146.26,2953.74 2325,2775 2450,2775 2533.46,2691.54 R53.1@2533.46,2625
BRAKE_PRESSURE_F: R70.2 U$5.3 U$24.3 U$24.4 U$30.4 U$31.3 | length 1491
  Top w10: U$31.3@1212.4,2698.82 1226.11,2685.11 v1(1226.11,2685) ; v1(1462.4,2601.18) 1470.29,2593.29 1470.29,2590.1 1492.18,2568.22 v1(1500,2568.22) ; v1(1575,2600) 1600,2625 1800,2625 ; U$5.3@1712.6,2976.18 1712.6,2923.82 1734.43,2902 1734.43,2865.57 1800,2800 1800,2625 ; U$24.3@2176.18,2737.4 U$24.4@2073.82,2737.4 2047.4,2737.4 2032.65,2722.65 2032.65,2699.19 R70.2@2000,2666.54 1958.46,2625 1800,2625
  Bottom w10: v1(1226.11,2685) 1309.93,2601.18 v1(1462.4,2601.18) ; v1(1500,2568.22) 1543.22,2568.22 v1(1575,2600)
BRAKE_PRESSURE_F_3_3: R70.1 R71.2 U1.10 | length 1491
  Top w10: R71.2@1900,2666.54 1933.07,2666.54 R70.1@2000,2733.46 2022.54,2756 2032.87,2756 2051.87,2775 v1(2250,2775) ; v1(2350,2801.89) 2601.89,2801.89 2875,3075 2875,3250 2906,3281 U1.10@3034,3281
  Bottom w10: v1(2250,2775) 2276.89,2801.89 v1(2350,2801.89)
BRAKE_TH: BRAKE.W BTH1.TP U$5.4 | length 1619.2
  Top w10: BTH1.TP@1050,1725 1095,1770 1095,1805 1225,1935 BRAKE.W@1225,1950 1225,2128.6 1257.81,2161.41 1257.81,2185.18 1306.63,2234 1456.63,2234 1542.48,2319.86 1542.48,2580.73 1550.37,2588.62 1550.37,2622.41 v1(1551.48,2623.52) ; v1(1530,2824.01) 1684.01,2824.01 1712.6,2852.6 U$5.4@1712.6,2873.82
  Bottom w10: v1(1530,2824.01) 1530,2645 v1(1551.48,2623.52)
BSPD_BP_OC: U$28.P2 U$31.1 | length 385.6
  Top w10: U$28.P2@1121.26,2916.73 1120,2915.47 1120,2855 1130,2845 1220,2845 1234.23,2830.77 1234.23,2773 1234,2772.77 1230.61,2769.39 1211.78,2750.56 1165.56,2750.56 1137.6,2722.6 U$31.1@1137.6,2698.82
BSPD_BP_SC: U$28.P4 U$30.1 | length 527.2
  Top w10: U$28.P4@1221.26,2916.73 1221.26,2888.74 1233,2877 1233.25,2877 1266.23,2844.03 1266.23,2759.75 1266,2759.52 1266,2585.57 1301.57,2550 1370,2550 1387.6,2532.4 U$30.1@1387.6,2498.82
BSPD_BRAKE_COND: C3.1 R1.1 U$27.2 | length 455
  Top w10: U$27.2@1500,3248.82 1500,3215 1525,3190 1726.54,3190 C3.1@1766.54,3150 1833.46,3083.07 R1.1@1833.46,3050
BSPD_COND: Q12.1 R83.2 U$27.4 | length 523.6
  Top w10: R83.2@1375,3333.46 1408.46,3300 1500,3300 1537.4,3337.4 U$27.4@1537.4,3351.18 1561.22,3375 1615.36,3375 1645,3404.64 1645,3489.29 Q12.1@1718.31,3562.6
BSPD_CS_OC: U$17.1 U$28.P3 | length 545.8
  Top w10: U$17.1@1137.6,2498.82 1137.6,2522.6 1165.56,2550.56 1211.78,2550.56 1250,2588.77 1250,2766.15 1250.23,2766.38 1250.23,2837.4 1226.63,2861 1190,2861 1171.26,2879.74 U$28.P3@1171.26,2916.73
BSPD_CS_SC: U$16.1 U$28.P5 | length 363.5
  Top w10: U$28.P5@1271.26,2916.73 1271.26,2861.62 1282.23,2850.65 1282.23,2687.77 1295,2675 1380,2675 1387.6,2682.6 U$16.1@1387.6,2698.82
BSPD_CURR_COND: C4.1 R36.1 U$27.1 | length 266
  Top w10: U$27.1@1462.6,3248.82 1462.6,3217.4 1530,3150 C4.1@1541.54,3150 1608.46,3083.07 R36.1@1608.46,3050
BSPD_SENSOR_FAULT: Q14.1 U$28.P1 | length 976.5
  Top w10: U$28.P1@1071.26,2916.73 1071.26,2971.26 1100,3000 1150,3000 1248.45,3098.45 1248.45,3448.45 1362.6,3562.6 Q14.1@1543.31,3562.6
BTSF_EN: Q18.1 R31.2 SOFT_FAULT_STAT.2 U1.41 | length 1283.4
  Top w10: v1(3225.11,3590) 3230,3585.11 U1.41@3230,3516 ; v1(3285,3601.11) 3292.89,3609 3509,3609 3566,3666 3566,3834 3483.46,3916.54 R31.2@3483.46,3975 3493.31,3984.84 v1(3493.31,4062.6)
  Top w16: SOFT_FAULT_STAT.2@3314.37,4330.31 3314.37,4240.63 3355,4200 3448.11,4200 v1(3450,4201.89)
  Bottom w10: v1(3225.11,3590) 3236.22,3601.11 v1(3285,3601.11)
  Bottom w16: v1(3450,4201.89) 3493.31,4158.58 v1(3493.31,4062.6)
CAN_RX: U1.32 U$11.4 | length 1142
  Top w10: U$11.4@2791.73,2675 2815,2675 v1(2820,2680) ; v1(2950,2875) 3061.22,2986.22 3068.68,2986.22 3100.46,3018 3167.68,3018 3225.79,3076.11 v1(3295,3076.11) ; U1.32@3366,3380 3420,3380 v1(3450,3350)
  Bottom w10: v1(2820,2680) 2950,2810 v1(2950,2875) ; v1(3295,3076.11) 3450,3231.11 v1(3450,3350)
CAN_STBY: U1.31 U$11.8 | length 743.4
  Top w10: U$11.8@3008.27,2825 v1(3050,2825) ; v1(3279.39,3279.39) 3279.39,3334.39 3305,3360 U1.31@3366,3360
  Bottom w10: v1(3050,2825) 3270,3045 3270,3270 v1(3279.39,3279.39)
CAN_TX: U1.33 U$11.1 | length 1141.7
  Top w10: U$11.1@2791.73,2825 v1(2825,2825) ; v1(3229.23,3045.77) 3298.44,3045.77 v1(3328.79,3076.11) ; U1.33@3366,3399 3367,3400 3395,3400 3398.5,3396.5 3426.13,3396.5 3432.06,3390.57 v1(3443.22,3390.57)
  Bottom w10: v1(2825,2825) 2986.22,2986.22 3068.68,2986.22 3128.23,3045.77 v1(3229.23,3045.77) ; v1(3328.79,3076.11) 3465.9,3213.22 3484.9,3213.22 3498.89,3227.21 3498.89,3334.9 v1(3443.22,3390.57)
CANH: CAN.1 D8.1 R20.2 R24.2 U$11.7 | length 628.6
  Top w16: U$11.7@3008.27,2775 3091.54,2775 R24.2@3100,2783.46 ; R20.2@3116.54,2875 3116.54,2800 R24.2@3100,2783.46 ; D8.1@3531.69,2787.4 3529.72,2789.37 CAN.1@3230.31,2789.37 3224.41,2783.46 R24.2@3100,2783.46